# Altium PCB PlacaSensor_MPXV7002.PcbDoc
Units mm, origin at the board's own origin, x right, y up, seen from the top; angles counter-clockwise.
Board outline 40 x 25 mm, 2 copper layers (Top Layer, Bottom Layer); 10 components, 3 nets, 25 pads, 20 vias.
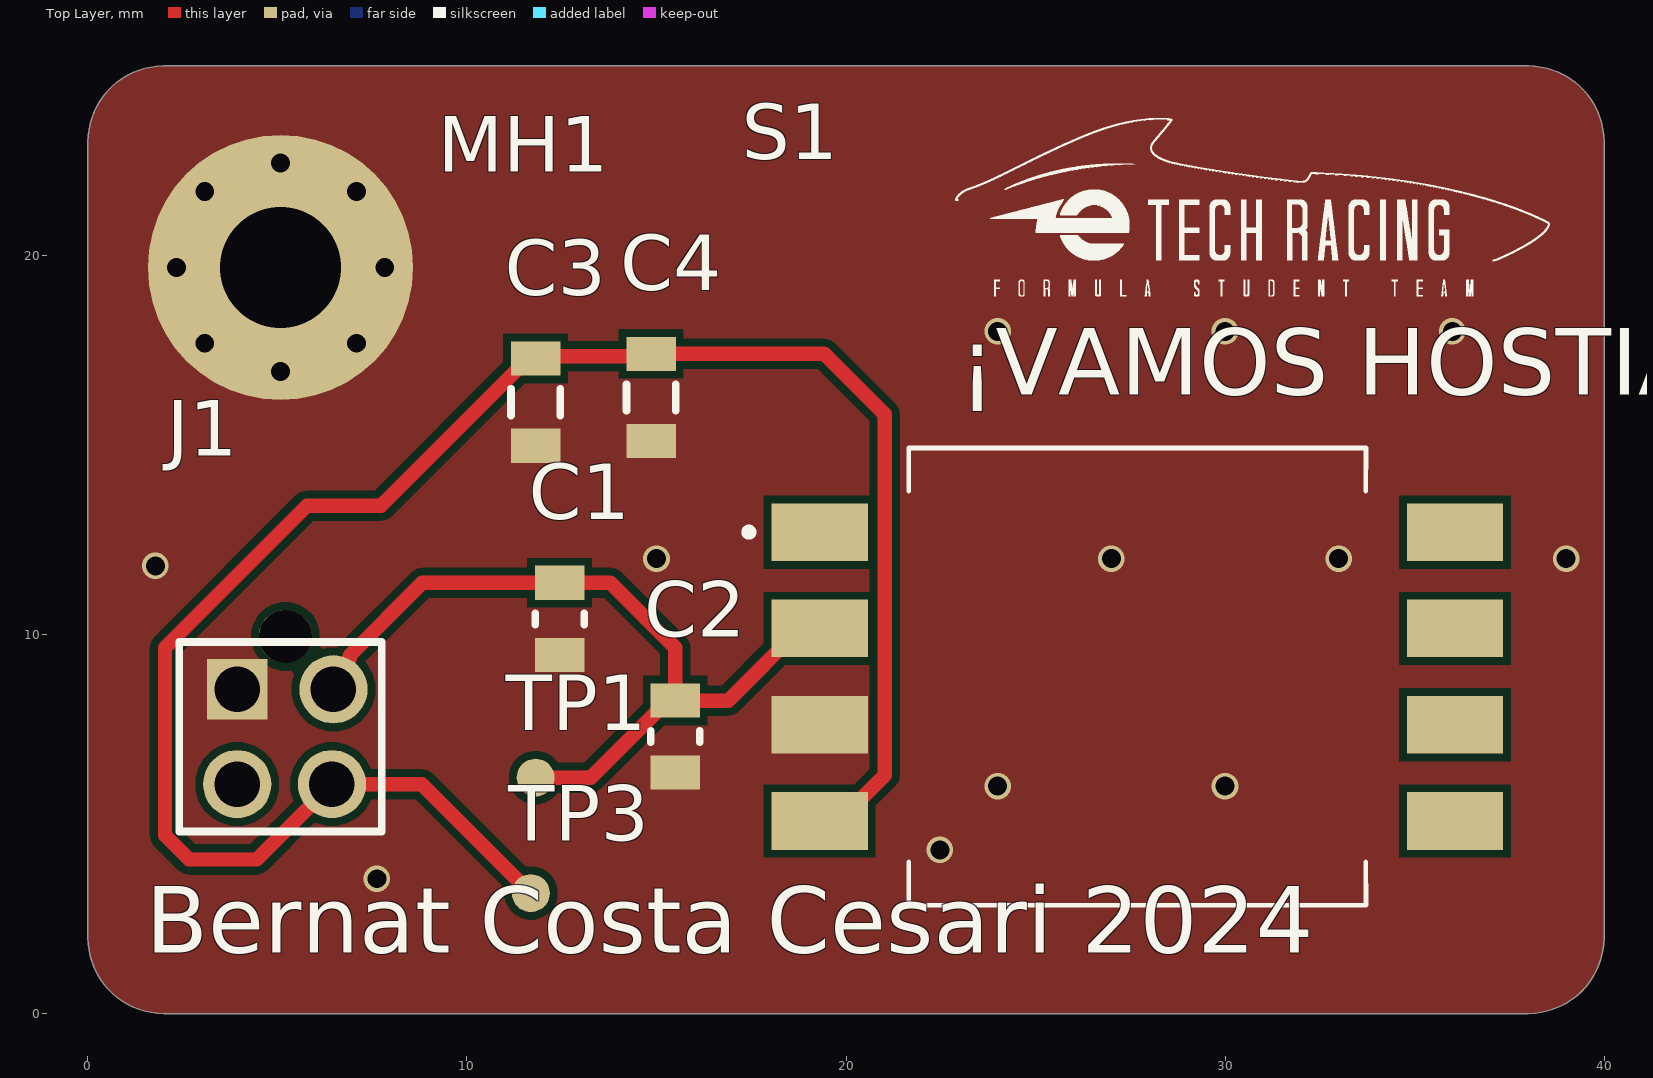
[diagram p0: Top Layer view]
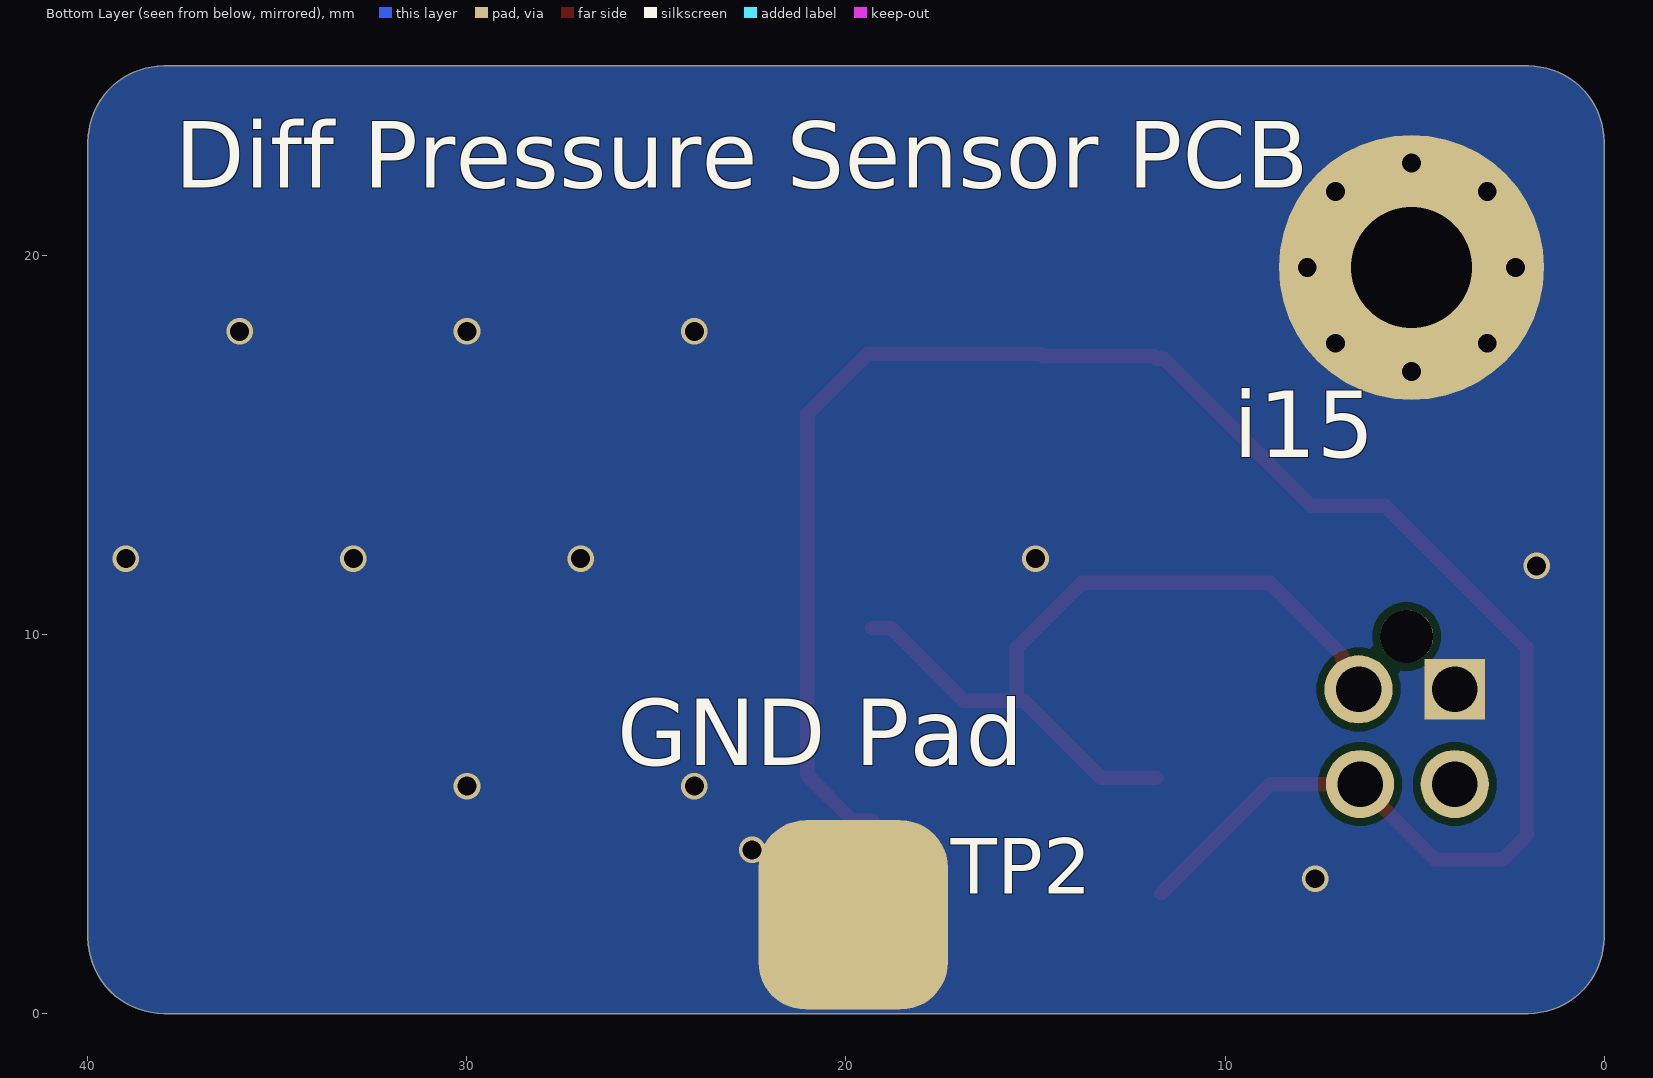
[diagram p1: Bottom Layer view, seen from below]
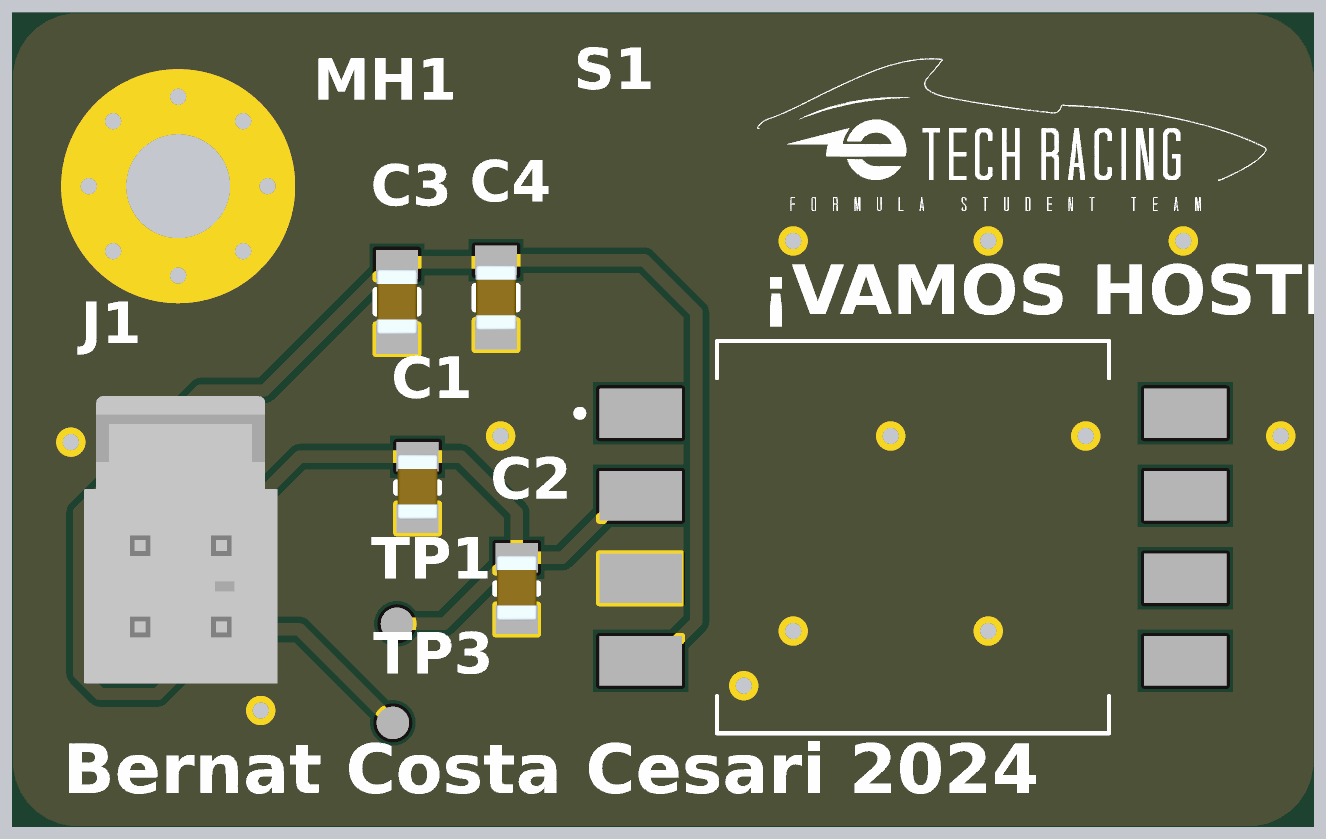
[diagram p2: 3D render of the assembled board from above, using the file's embedded part models]

## Layer stack, top to bottom
Top Solder: solder mask 0.0102, Solder Resist, Dk 3.5
Top Layer: signal copper 0.0356
Dielectric 1: dielectric 0.32, FR-4, Dk 4.8
Bottom Layer: signal copper 0.0356
Bottom Solder: solder mask 0.0102, Solder Resist, Dk 3.5

## Board outline
0,2 0,23 cw(c2,23) 2,25 38,25 cw(c38,23) 40,23 40,2 cw(c38,2) 38,0 2,0 cw(c2,2)

## Design rules (kind name [scope] priority, off if disabled: settings)
Clearance [All] p1: gap=0.2 ignorepadtopadclearanceinfootprint=TRUE
HoleSize [All] p1: absolutevalues=TRUE maxlimit=5 minlimit=0.2 maxpercent=80.000 minpercent=20.000
PlaneClearance [All] p1: clearance=0.5
PlaneConnect [All] p1: planeconnectstyle=Direct reliefexpansion=0.508 reliefentries=4 reliefconductorwidth=0.254 reliefairgap=0.254
PolygonConnect [All] p1: connectstyle=Direct reliefconductorwidth=0.254 reliefentries=4 polygonreliefangle="90 Angle" airgapwidth=0.254
RoutingVias [All] p1: holewidth=0.5 width=0.7 viastyle="Through Hole" minholewidth=0.15 minwidth=0.2 maxholewidth=0.8 maxwidth=1
SolderMaskExpansion [All] p1: expansion=0.102 istentingtop=FALSE
Width [All] p1: maxlimit=0.5 minlimit=0.2 preferedwidth=0.3 minimp=50.000000 maximp=50.000000 favimp=50.000000
27 further rules are at their usual default settings.

## Components (designator, comment, footprint, x,y, rotation, side; value= is the part's Value field where it differs from the comment)
C1 "885012207103" C0805FNPC-R 12.446,10.414 r270 top
C2 "885012207092" C0805FNPC-R 15.494,7.305 r270 top
C3 "885012007057" C0805FNPC-W 11.811,16.129 r270 top
C4 "885012007057" C0805FNPC-W 14.859,16.256 r270 top
J1 "J_NanoFit_2x2" J_NanoFit_2x2_v 5.207,8.001 r0 top
MH1 "Mounting_Hole_M3" Mounting_Hole_M3 5.08,19.685 r0 top
S1 "MPXV7002" XDCR_MPXV7002DP 27.686,8.89 r0 top
TP1 "TestPoint" TestPoint 11.811,6.223 r90 top
TP2 "Test Point" TESTPOINT_WIDE 19.812,2.602 r180 bottom
TP3 "TestPoint" TestPoint 11.684,3.175 r90 top

## Footprints (in the part's own frame and the unit in brackets; to place one, negate y for a bottom-side part, rotate by r counter-clockwise, add the part's x,y. Pads: shape width x height; smd on the part's side, far side on the other; paste and mask are expansions set on the pad)
C0805FNPC-R [mm]
  rect 0.9x1.3 smd: 1(-0.95,0) 2(0.95,0)
  silkscreen extent -0.15,-0.65 0.15,0.65, body extent -1.03,-0.63 0.97,0.63, height 0.96
C0805FNPC-W [mm]
  rect 0.9x1.3 smd: 1(-1.15,0) 2(1.15,0)
  silkscreen extent -0.35,-0.65 0.35,0.65, body extent -1,-0.63 1,0.63, height 0.96
J_NanoFit_2x2_v [mm]
  round 1.8 hole 1.2: 1(1.27,0.552) 3(1.23,-1.949) 4(-1.27,-1.949)
  rect 1.6x1.6 hole 1.2: 2(-1.27,0.552)
  round 1.4 hole 1.4: 5(0,1.949)
  silkscreen extent -2.79,-3.2 2.54,1.8, body extent -3.02,-3.61 2.92,5.23, height 9.92
Mounting_Hole_M3 [mm]
  round 7 hole 3.2: 1(0,0)
TestPoint [mm]
  round 1 smd: 1(0,0)
TESTPOINT_WIDE [mm]
  rrect50% 5x5 smd paste-2539.97: 1(0,0)
XDCR_MPXV7002DP [mm]
  rect 2.54x1.52 smd: 1(-8.38,3.81) 2(-8.38,1.27) 3(-8.38,-1.27) 4(-8.38,-3.81) 5(8.38,-3.81) 6(8.38,-1.27) 7(8.38,1.27) 8(8.38,3.81)
  silkscreen extent -10.35,-6.03 6.03,6.03

## Part data
C1: library part C1u-50V-0805FNPC-X7R, "Multilayer Ceramic Capacitor, Wcap-Csgp Series, 1 F, 10%, X7R, 50 V, 0805 [2012 Metric] Rohs Compliant: Yes", Capacitance=1uF, Case Code (Imperial)=0805, Case Code (Metric)=2012, Dielectric=X7R, Manufacturer 1="Wurth Electronics", Max Operating Temperature=85°C, Min Operating Temperature=-55°C, Supplier Part Number 1=1813523, Tolerance=10%, Voltage Rating=50V, .Creator=GP, Case/Package=0805, Category="Ceramic Capacitors", ComponentLink1Description=http://www.farnell.com/datasheets/1958501.pdf?src-supplier=Farnell, ComponentLink1URL=http://www.farnell.com/datasheets/1958501.pdf?src-supplier=Farnell, ComponentLink2Description=http://www.farnell.com/datasheets/1958501.pdf?src-supplier=Element14, ComponentLink2URL=http://www.farnell.com/datasheets/1958501.pdf?src-supplier=Element14, ComponentLink3Description=https://katalog.we-online.de/pbs/datasheet/885012107003.pdf?src-supplier=Digi-Key, ComponentLink3URL=https://katalog.we-online.de/pbs/datasheet/885012107003.pdf?src-supplier=Digi-Key, ComponentLink4Description=http://www.farnell.com/datasheets/1958501.pdf?src-supplier=Newark, ComponentLink4URL=http://www.farnell.com/datasheets/1958501.pdf?src-supplier=Newark, Length=0.079inch, Manufacturer Part Number 1=885012207103, Mount="Surface Mount", Packaging="Cut Tape", Pricing 1="50=0,27200, 250=0,25300, 500=0,22800, 1250=0,20100, 2500=0,17100 (GBP)", REACH SVHC=Unknown, RoHS=Yes, RoHS Compliant=Yes, Stock 1=5100, Supplier 1=RSComponents, Thickness=0.053inch, Voltage Rating (DC)=50V, Width=0.049inch
C2: library part C10n-50V-0805FNPC-X7R, "Cap, 0.01ΜF, 50V, 10%, X7R, 0805", Capacitance=10nF, Case Code (Imperial)=0805, Case Code (Metric)=2012, Dielectric=X7R, Manufacturer 1="Wurth Electronics", Max Operating Temperature=125°C, Min Operating Temperature=-55°C, Supplier Part Number 1=1813941, Tolerance=10%, Voltage Rating=50V, .Creator=DR, Case/Package=0805, Category="Ceramic Capacitors", ComponentLink1Description=http://www.farnell.com/datasheets/1958497.pdf?src-supplier=Farnell, ComponentLink1URL=http://www.farnell.com/datasheets/1958497.pdf?src-supplier=Farnell, ComponentLink2Description=http://www.farnell.com/datasheets/1958497.pdf?src-supplier=Element14, ComponentLink2URL=http://www.farnell.com/datasheets/1958497.pdf?src-supplier=Element14, ComponentLink3Description=http://www.farnell.com/datasheets/1958497.pdf?src-supplier=Newark, ComponentLink3URL=http://www.farnell.com/datasheets/1958497.pdf?src-supplier=Newark, ComponentLink4Description=https://katalog.we-online.de/pbs/datasheet/885012207092.pdf?src-supplier=Digi-Key, ComponentLink4URL=https://katalog.we-online.de/pbs/datasheet/885012207092.pdf?src-supplier=Digi-Key, Length=0.079inch, Manufacturer Part Number 1=885012207092, Mount="Surface Mount", Packaging="Cut Tape", Pricing 1="4000=0,03200, 12000=0,03100 (USD)", REACH SVHC=Unknown, RoHS=Yes, RoHS Compliant=Yes, Stock 1=1, Supplier 1=RSComponents, Thickness=0.035inch, Voltage Rating (DC)=50V, Width=0.049inch
C3: library part C100p-50V-0805FNPC-C0G/NP0, "Multilayer Ceramic Capacitor, Wcap-Csgp Series, 100 Pf, 5%, C0G / Np0, 50 V, 0805 [2012 Metric] Rohs Compliant: Yes", Capacitance=100pF, Case Code (Imperial)=0805, Case Code (Metric)=2012, Dielectric=C0G, Manufacturer="Wurth Electronics", Max Operating Temperature=125°C, Min Operating Temperature=-55°C, Supplier Part Number 1=1813930, Tolerance=5%, Voltage Rating=50V, .Creator=DR, Case/Package=0805, Category="Ceramic Capacitors", ComponentLink1Description=http://www.farnell.com/datasheets/1958443.pdf?src-supplier=Farnell, ComponentLink1URL=http://www.farnell.com/datasheets/1958443.pdf?src-supplier=Farnell, ComponentLink2Description=https://katalog.we-online.de/pbs/datasheet/885012007057.pdf?src-supplier=Digi-Key, ComponentLink2URL=https://katalog.we-online.de/pbs/datasheet/885012007057.pdf?src-supplier=Digi-Key, ComponentLink3Description=http://www.farnell.com/datasheets/1958443.pdf?src-supplier=Element14, ComponentLink3URL=http://www.farnell.com/datasheets/1958443.pdf?src-supplier=Element14, ComponentLink4Description=http://www.farnell.com/datasheets/1958443.pdf?src-supplier=Newark, ComponentLink4URL=http://www.farnell.com/datasheets/1958443.pdf?src-supplier=Newark, ComponentLink5Description="Where buy it", ComponentLink5URL=https://www.we-online.com/catalog/en/WCAP-CSGP-50VDC#885012007057, Length=0.079inch, Manufacturer part number=885012007057, Mount="Surface Mount", Packaging="Cut Tape", Pricing 1="4000=0,03900, 12000=0,03800 (USD)", REACH SVHC=Unknown, RoHS=Yes, RoHS Compliant=Yes, Stock 1=1, Supplier 1=RSComponents, Thickness=0.035inch, Voltage Rating (DC)=50V, Width=0.049inch
C4: library part C100p-50V-0805FNPC-C0G/NP0, "Multilayer Ceramic Capacitor, Wcap-Csgp Series, 100 Pf, 5%, C0G / Np0, 50 V, 0805 [2012 Metric] Rohs Compliant: Yes", Capacitance="2x 100pF", Case Code (Imperial)=0805, Case Code (Metric)=2012, Dielectric=C0G, Manufacturer="Wurth Electronics", Max Operating Temperature=125°C, Min Operating Temperature=-55°C, Supplier Part Number 1=1813930, Tolerance=5%, Voltage Rating=50V, .Creator=DR, Case/Package=0805, Category="Ceramic Capacitors", ComponentLink1Description=http://www.farnell.com/datasheets/1958443.pdf?src-supplier=Farnell, ComponentLink1URL=http://www.farnell.com/datasheets/1958443.pdf?src-supplier=Farnell, ComponentLink2Description=https://katalog.we-online.de/pbs/datasheet/885012007057.pdf?src-supplier=Digi-Key, ComponentLink2URL=https://katalog.we-online.de/pbs/datasheet/885012007057.pdf?src-supplier=Digi-Key, ComponentLink3Description=http://www.farnell.com/datasheets/1958443.pdf?src-supplier=Element14, ComponentLink3URL=http://www.farnell.com/datasheets/1958443.pdf?src-supplier=Element14, ComponentLink4Description=http://www.farnell.com/datasheets/1958443.pdf?src-supplier=Newark, ComponentLink4URL=http://www.farnell.com/datasheets/1958443.pdf?src-supplier=Newark, ComponentLink5Description="Where buy it", ComponentLink5URL=https://www.we-online.com/catalog/en/WCAP-CSGP-50VDC#885012007057, Length=0.079inch, Manufacturer part number=885012007057, Mount="Surface Mount", Packaging="Cut Tape", Pricing 1="4000=0,03900, 12000=0,03800 (USD)", REACH SVHC=Unknown, RoHS=Yes, RoHS Compliant=Yes, Stock 1=1, Supplier 1=RSComponents, Thickness=0.035inch, Voltage Rating (DC)=50V, Width=0.049inch
J1: "Conn Nano-Fit Power HDR 4 POS 2.5mm Solder ST Through Hole 4 Terminal Single Port Tray", Manufacturer 1=Molex, Manufacturer Part Number 1=1053101104, Supplier Part Number 1=2820681, Category=Uncategorized, ComponentLink1Description=https://www.molex.com/pdm_docs/ps/PS-105300-100-001.pdf?src-supplier=Digi-Key, ComponentLink1URL=https://www.molex.com/pdm_docs/ps/PS-105300-100-001.pdf?src-supplier=Digi-Key, Pricing 1="1=1,43000, 10=1,18000, 50=0,74900, 100=0,72900, 500=0,71400, 1000=0,70700 (EUR)", RoHS=Yes, Stock 1=255, Supplier 1=Farnell
TP1 TP3: "Test Point 1x1 mm", .Creator=GP, .PCBcheck=GP, .SCHcheck=GP, Category=TestPoint
TP2: library part TestPoint_Wide, "TestPoint 5x5mm"

## Via types
v1: diameter 0.7, hole 0.5, Top Layer to Bottom Layer, 20 vias

## Nets (pads, with @x,y where several pads share a name; then routed paths per layer and width w, separated by ;. In a path a pad name is that pad's centre, name@x,y a point inside that pad or via, vN(x,y) a via of type N, cw(c..) or ccw(c..) an arc to the next point about the centre after c; other vN are vias at no path point)
+5: C1.1 C2.1 J1.1 S1.2 TP1.1 | length 21.7
  Top Layer w0.381: J1.1 6.477,8.936 6.904,9.364 6.904,9.444 8.824,11.364 C1.1 13.782,11.364 15.494,9.652 C2.1 ; TP1.1 13.262,6.223 15.294,8.255 C2.1 ; S1.2 18.796,10.16 16.891,8.255 C2.1
GND: C1.2 C2.2 C3.2 C4.2 J1.2 MH1.1 S1.3 TP2.1
  other v1: 7.62,3.556 22.479,4.318 24,6 30,6 1.778,11.811 15,12 27,12 33,12 39,12 5.08,16.935 3.08,17.685 7.08,17.685 24,18 30,18 36,18 2.33,19.685 7.83,19.685 3.08,21.685 7.08,21.685 5.08,22.435
Vout: C3.1 C4.1 J1.3 S1.4 TP3.1 | length 51.5
  Top Layer w0.381: TP3.1 8.807,6.052 J1.3 4.449,4.064 2.667,4.064 2.032,4.699 2.032,9.652 5.779,13.399 7.731,13.399 11.611,17.279 C3.1 11.874,17.343 14.795,17.343 C4.1 19.424,17.406 21.02,15.81 21.02,6.285 19.816,5.08 S1.4
pads on no net: J1.4 J1.5 S1.1 S1.5 S1.6 S1.7 S1.8

## Polygon pours and split planes (outlines as drawn)
GND on Top Layer "GND_L01_P000" (solid, pour order 0): 0,2 0,23 cw(c2,23) 2,25 38,25 cw(c38,23) 40,23 40,2 cw(c38,2) 38,0 2,0 cw(c2,2)
GND on Bottom Layer "GND_L02_P001" (solid, pour order 1): 0,2 0,23 cw(c2,23) 2,25 38,25 cw(c38,23) 40,23 40,2 cw(c38,2) 38,0 2,0 cw(c2,2)

## Silkscreen, mask and mechanical layers (free items; w line width, h text height)
Top Overlay:
  drawing of 32 lines, arcs and shapes, not listed
  text "¡VAMOS HOSTIA!" at 22.99,15.748 h3
  text "Bernat Costa Cesari 2024" at 1.527,1.016 h3
Bottom Overlay:
  text "Diff Pressure Sensor PCB" at 37.716,21.209 h3
  text "i15" at 9.776,14.097 h3
  text "GND Pad" at 26.035,5.969 h3
Mechanical 1:
  the board outline again, w0.254